# Altium PCB PCB.PcbDoc
Units mm, origin at the board's own origin, x right, y up, seen from the top; angles counter-clockwise.
Board outline 40 x 49 mm, 2 copper layers (Top Layer, Bottom Layer), stack 1.671 mm thick; 32 components, 31 nets, 117 pads, 7 vias.
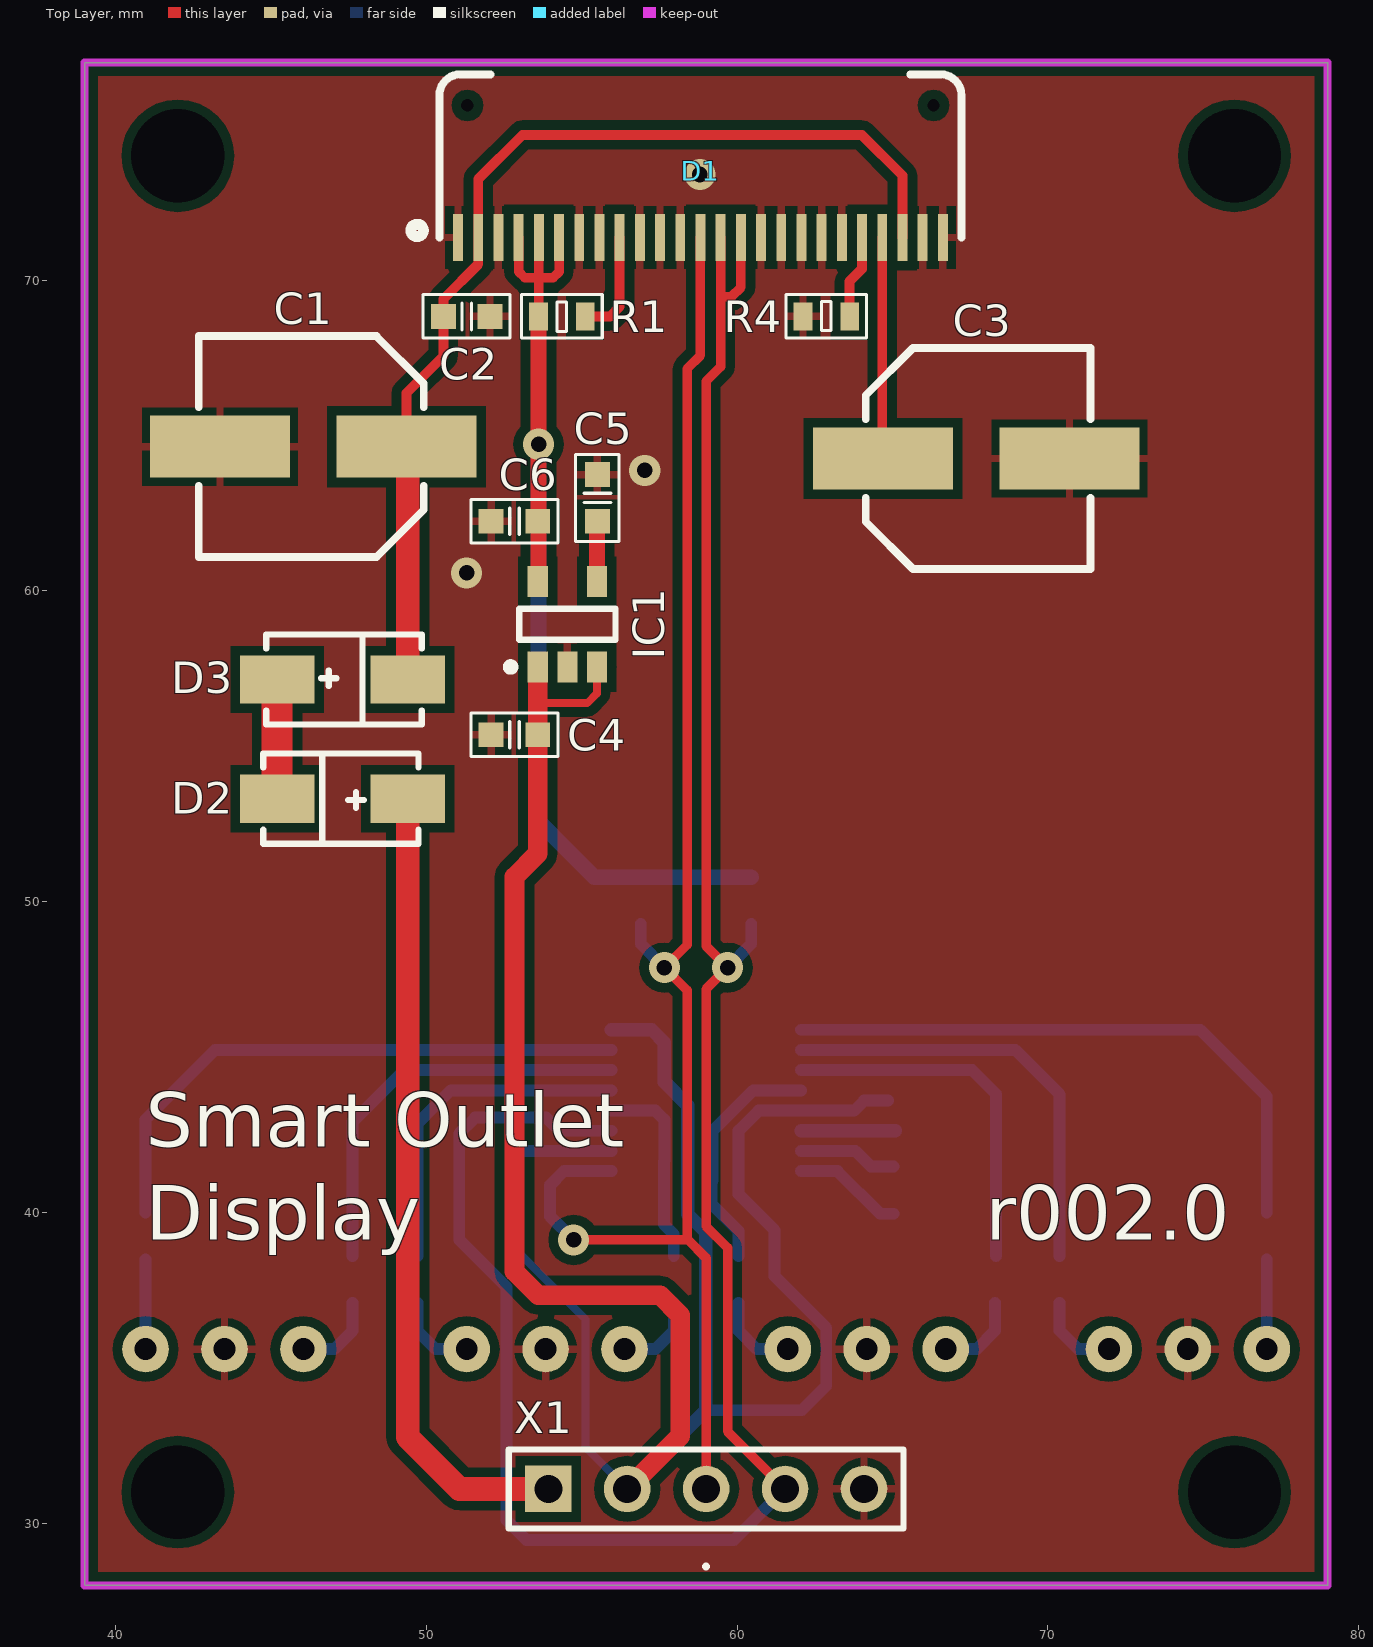
[diagram p0: Top Layer view]
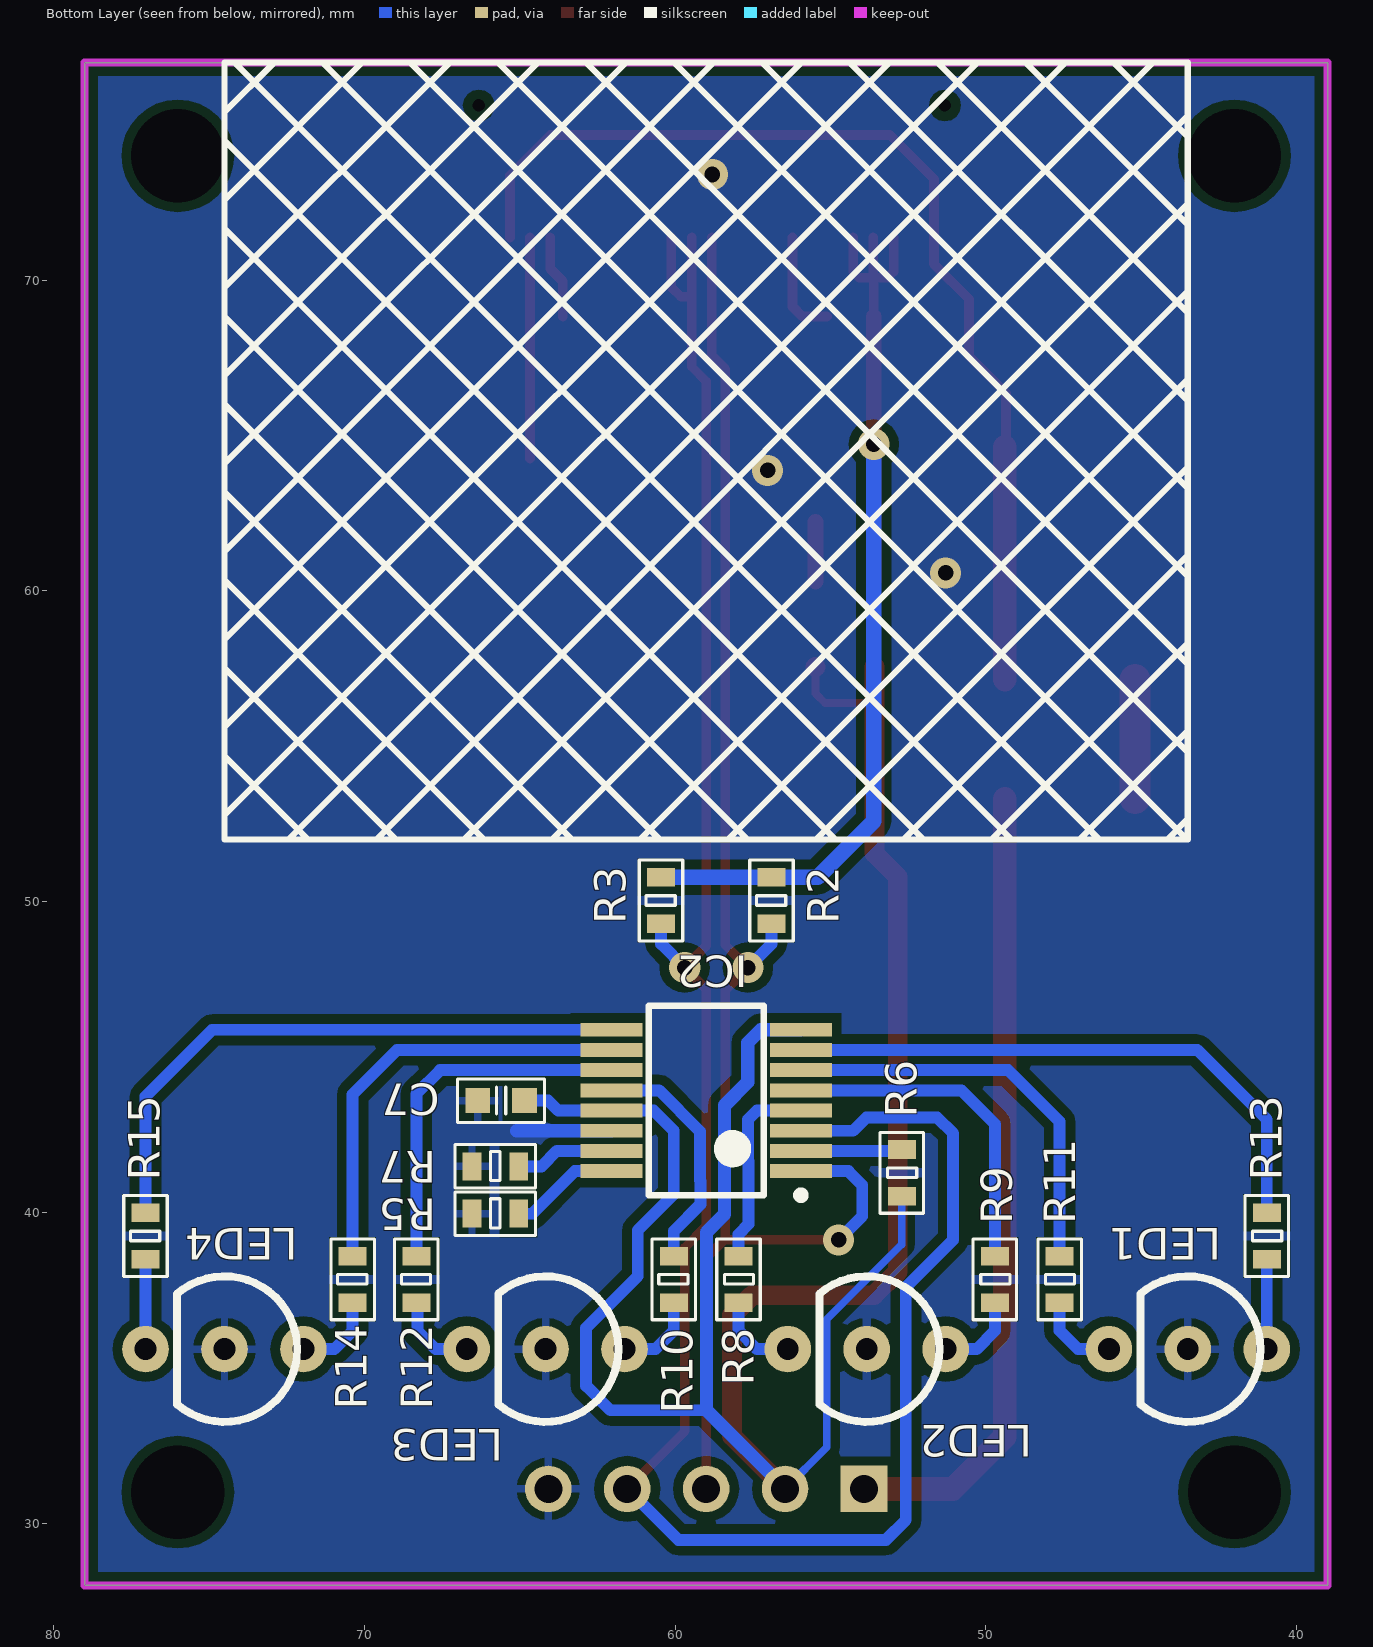
[diagram p1: Bottom Layer view, seen from below]

## Layer stack, top to bottom
Top Solder: solder mask 0.0102, Solder Resist, Dk 3.5
Top Layer: signal copper 0.0356
Dielectric 1: dielectric 1.6, FR-4, Dk 4.8
Bottom Layer: signal copper 0.0356
Bottom Solder: solder mask 0.0102, Solder Resist, Dk 3.5

## Board outline
39,28 79,28 79,77 39,77

## Design rules (kind name [scope] priority, off if disabled: settings)
Clearance [All] p1: gap=0.2 ignorepadtopadclearanceinfootprint=FALSE except(0.3: Arc-Poly Track-Poly SMDPad-Poly THPad-Poly Via-Poly Fill-Poly Poly-Poly Poly-Region Poly-Text Poly-Hole)
HoleSize [All] p1: absolutevalues=TRUE maxlimit=3 minlimit=0.025 maxpercent=80.000 minpercent=20.000
MinimumSolderMaskSliver [All] p1: minsoldermaskwidth=0
PolygonConnect [All] p1: thpad.connectstyle=Relief thpad.reliefconductorwidth=0.254 thpad.reliefentries=4 thpad.polygonreliefangle="90 Angle" thpad.airgapwidth=0.254 smdpad.connectstyle=Relief smdpad.reliefconductorwidth=0.254 smdpad.reliefentries=4 smdpad.polygonreliefangle="90 Angle" smdpad.airgapwidth=0.254 via.connectstyle=Direct via.reliefconductorwidth=0.254 via.reliefentries=4 via.polygonreliefangle="90 Angle" via.airgapwidth=0.254
RoutingVias [All] p1: holewidth=0.711 width=1.27 viastyle="Through Hole" minholewidth=0.5 minwidth=1 maxholewidth=0.711 maxwidth=1.27
SilkToSilkClearance [All] p1: silktosilkclearance=0.051
SilkToSolderMaskClearance [IsPad] p1: minsilkscreentomaskgap=0 clearancetoexposedcopper=TRUE
SolderMaskExpansion [All] p1: expansion=0.102
Width [All] p1: maxlimit=2.54 minlimit=0.254 preferedwidth=1.27
26 further rules are at their usual default settings.

## Components (designator, comment, footprint, x,y, rotation, side; value= is the part's Value field where it differs from the comment)
C1 "4.7u" R79 46.355,64.643 r270 top value=470u
C2 "100n" C_0603 51.293,68.834 r180 top
C3 "4.7u" R79 67.691,64.262 r90 top value=470u
C4 "1u" C_0603 52.832,55.372 r180 top
C5 "100n" C_0603 55.499,62.992 r90 top
C6 "2.2u" C_0603 52.832,62.242 r180 top
C7 "100n" C_0603 65.6,43.6 r0 bottom
D1 "UG-9664HSWAG01" UG-9664HSWAG01 58.816,71.374 r0 top
D2 "D_DO-214AC" DO-214AC 47.295,53.315 r0 top
D3 "D_DO-214AC" DO-214AC 47.295,57.15 r180 top
IC1 "LP2985" SOT23-5 54.534,58.928 r90 top
IC2 "ADG728" SSOP-16 59,43.604 r0 bottom
LED1 "GNL-3015" GNL-3015 43.5,35.604 r180 bottom
LED2 "GNL-3015" GNL-3015 53.833,35.604 r180 bottom
LED3 "GNL-3015" GNL-3015 64.167,35.604 r180 bottom
LED4 "GNL-3015" GNL-3015 74.5,35.604 r180 bottom
R1 "10k" R_0603 54.356,68.834 r0 top
R2 "4.7k" R_0603 56.896,50.038 r270 bottom
R3 "4.7k" R_0603 60.452,50.038 r270 bottom
R4 "910k" R_0603 62.865,68.834 r180 top
R5 "10k" R_0603 65.786,39.959 r0 bottom
R6 "10k" R_0603 52.705,41.275 r90 bottom
R7 "10k" R_0603 65.786,41.483 r0 bottom
R8 "560" R_0603 57.958,37.846 r90 bottom
R9 "560" R_0603 49.708,37.846 r90 bottom
R10 "560" R_0603 60.042,37.846 r270 bottom
R11 "560" R_0603 47.625,37.846 r90 bottom
R12 "560" R_0603 68.326,37.846 r270 bottom
R13 "560" R_0603 40.96,39.243 r90 bottom
R14 "560" R_0603 70.375,37.846 r270 bottom
R15 "560" R_0603 77.04,39.243 r270 bottom
X1 "PLS-5" PLS-5-3D 53.92,31.104 r0 top

## Footprints (in the part's own frame and the unit in brackets; to place one, negate y for a bottom-side part, rotate by r counter-clockwise, add the part's x,y. Pads: shape width x height; smd on the part's side, far side on the other; paste and mask are expansions set on the pad)
C_0603 [mm] "Chip Capacitor; Body 1.6 x 0.8 mm (LxW typ)"
  rect 0.8x0.8 smd: 1(-0.75,0) 2(0.75,0)
  silkscreen extent -1.4,-0.7 1.4,0.7, body extent -0.8,-0.4 0.8,0.4, height 0.3
DO-214AC [mm]
  rect 2.4x1.55 smd: 1(2.1,0) 2(-2.1,0)
  silkscreen extent -2.55,-1.45 2.45,1.45, body extent -2.6,-1.3 2.6,1.3, height 2.39
GNL-3015 [mm]
  round 1.5 hole 0.7: 1(-2.54,0) 2(0,0) 3(2.54,0)
  silkscreen extent -1.52,-2.34 2.34,2.34, body extent -2.79,-2.02 2.79,2.03, height 8.21
PLS-5-3D [mm] "Connector; Header; 5 Position"
  rect 1.5x1.5 hole 0.9: 1(0,0)
  round 1.5 hole 0.9: 2(2.54,0) 3(5.08,0) 4(7.62,0) 5(10.16,0)
  silkscreen extent -1.27,-1.27 11.43,1.27, body extent -1.27,-1.27 11.43,1.27, height 8.44
R79 [mm]
  rect 2x4.5 smd: 1(0,3) 2(0,-3)
  silkscreen extent -3.56,-3.68 3.56,3.56, body extent -3.3,-3.5 3.3,3.5, height 3.91
R_0603 [mm]
  rect 0.6x0.9 smd: 1(-0.75,0) 2(0.75,0)
  silkscreen extent -1.3,-0.7 1.3,0.7, body extent -0.8,-0.41 0.8,0.41, height 0.45
SOT23-5 [mm]
  rect 1x0.65 smd: 1(-1.375,0.95) 2(-1.375,0) 3(-1.375,-0.95) 4(1.375,-0.95) 5(1.375,0.95)
  silkscreen extent -1.5,-1.55 0.5,1.95, body extent -1.25,-1.5 1.25,1.5, height 1.15
SSOP-16 [mm]
  rect 2x0.45 smd: 1(-3.05,2.275) 2(-3.05,1.625) 3(-3.05,0.975) 4(-3.05,0.325) 5(-3.05,-0.325) 6(-3.05,-0.975) 7(-3.05,-1.625) 8(-3.05,-2.275) 9(3.05,-2.275) 10(3.05,-1.625) 11(3.05,-0.975) 12(3.05,-0.325) 13(3.05,0.325) 14(3.05,0.975) 15(3.05,1.625) 16(3.05,2.275)
  silkscreen extent -3.17,-3.05 1.85,3.17, body extent -3.9,-3.1 3.9,3.1, height 1.9
UG-9664HSWAG01 [mm]
  rect 0x0 hole 0.4: 0(-7.5,4.25) 0(7.5,4.25)
  rect 0.32x1.5 smd: 1(-7.8,0) 2(-7.15,0) 3(-6.5,0) 4(-5.85,0) 5(-5.2,0) 6(-4.55,0) 7(-3.9,0) 8(-3.25,0) 9(-2.6,0) 10(-1.95,0) 11(-1.3,0) 12(-0.65,0) 13(0,0) 14(0.65,0) 15(1.3,0) 16(1.95,0) 17(2.6,0) 18(3.25,0) 19(3.9,0) 20(4.55,0) 21(5.2,0) 22(5.85,0) 23(6.5,0) 24(7.15,0) 25(7.8,0)
  silkscreen extent -8.4,0 8.4,5.25

## Part data
C1 C3: library part Electrolit, "Electrolit capasitor"
C2 C4 C5 C6 C7: library part C0603, "Capacitor"
D1: "Display"
D2 D3: "Diode"
IC1: "150-mA Low-noise Low-dropout Regulator With Shutdown", Link=https://www.rcscomponents.kiev.ua/product/lp2985a-33dbvr_31082.html
IC2: "2-Wire Serially Controlled, Matrix Switches"
LED1 LED2 LED3 LED4: "Bi-color LED"
R1 R2 R3 R4 R5 R6 R7 R8 R9 R10 R11 R12 R13 R14 R15: library part R0603, "Resistor"
X1: "Header, 5-Pin", LatestRevisionDate=17-Jul-2002, LatestRevisionNote="Re-released for DXP Platform.", Publisher="Altium Limited"

## Free pads (board coordinates)
  round 0 hole 3: 0(42,31) 0(42,74) 0(76,31) 0(76,74)

## Via types
v1: diameter 1, hole 0.5, Top Layer to Bottom Layer, tented both sides, 6 vias
v2: diameter 1, hole 0.5, Top Layer to Bottom Layer, 1 vias

## Nets (pads, with @x,y where several pads share a name; then routed paths per layer and width w, separated by ;. In a path a pad name is that pad's centre, name@x,y a point inside that pad or via, vN(x,y) a via of type N, cw(c..) or ccw(c..) an arc to the next point about the centre after c; other vN are vias at no path point)
3.3V: C6.1 D1.4 D1.5 D1.6 IC1.5 R1.1 R2.1 R3.1 | length 34.5
  Top Layer w0.305: D1.4 52.966,70.275 53.162,70.079 53.613,70.079 ; R1.1 53.606,70.072 53.613,70.079 ; D1.5 53.616,70.082 53.613,70.079 ; D1.6 54.266,70.268 54.077,70.079 53.613,70.079
  Top Layer w0.508: IC1.5@53.606,60.303 v1(53.606,64.719) R1.1
  Bottom Layer w0.508: v1(53.606,64.719) 53.606,52.591 55.409,50.788 R2.1 R3.1
5V: C4.1 C7.1 IC1.1 IC1.3 IC2.8 IC2.13 R6.1 X1.2 | length 82.5
  Top Layer w0.254: 53.582,56.388 55.17,56.388 55.484,56.702 IC1.3
  Top Layer w0.635: IC1.1 53.582,57.551 53.582,56.388 C4.1 53.582,51.55 52.832,50.8 52.832,38.1 53.594,37.338 57.516,37.338 58.166,36.688 58.166,32.81 X1.2 ; IC1.3 IC1.3@55.487,57.55
  Bottom Layer w0.254: R6.1 52.705,38.974 55.118,36.561 55.118,32.446 X1.2
  Bottom Layer w0.381: 58.989,33.633 62.081,33.633 62.865,34.417 62.865,36.283 61.202,37.946 61.202,39.426 60.042,40.586 60.042,42.634 60.686,43.279 IC2.13 63.759,43.279 64.08,43.6 C7.1
  Bottom Layer w0.432: IC2.8 57.245,45.879 57.658,45.466 57.658,44.196 58.411,43.443 58.411,39.939 58.989,39.361 58.989,33.633 X1.2
11V: C1.1 C2.2 D1.2 D1.23 D3.2 | length 33.8
  Top Layer w0.32: C1.1 49.355,66.373 50.543,67.561 C2.2 50.543,69.39 51.666,70.513 D1.2 51.666,73.256 53.086,74.676 64.008,74.676 65.316,73.368 D1.23
  Top Layer w0.762: D3.2 C1.1@49.395,64.643
12V: D2.1 X1.1 | length 25.8
  Top Layer w0.762: D2.1 49.395,32.774 51.065,31.104 X1.1
GND: C1.2 C2.1 C3.2 C4.2 C5.2 C6.2 C7.2 D1.1 D1.3 D1.7 D1.8 D1.10 D1.11 D1.12 D1.16 D1.17 D1.18 D1.19 D1.20 D1.24 D1.25 IC1.2 IC2.14 LED1.2 LED2.2 LED3.2 LED4.2 R4.2 R5.2 R7.2 X1.5 | length 3
  Bottom Layer w0.42: IC2.14 65.095,42.629
  other v1: 51.293,60.579 57.023,63.881 58.8,73.4
LED1: LED1.1 R11.1 | length 2.7
  Bottom Layer w0.381: LED1.1 47.034,35.604 47.625,36.195 R11.1
LED2: LED1.3 R13.1 | length 2.9
  Bottom Layer w0.381: LED1.3 R13.1
LED3: LED2.1 R8.1 | length 2.7
  Bottom Layer w0.381: LED2.1 57.367,35.604 57.958,36.195 R8.1
LED4: LED2.3 R9.1 | length 2.7
  Bottom Layer w0.381: R9.1 49.708,36.195 50.299,35.604 LED2.3
LED5: LED3.1 R12.2 | length 2.7
  Bottom Layer w0.381: LED3.1 67.701,35.604 68.292,36.195 R12.2@68.292,37.096
LED6: LED3.3 R10.2 | length 2.7
  Bottom Layer w0.381: R10.2 60.042,36.195 60.633,35.604 LED3.3
LED7: LED4.1 R15.2 | length 2.9
  Bottom Layer w0.381: LED4.1 R15.2
LED8: LED4.3 R14.2 | length 2.7
  Bottom Layer w0.381: R14.2 70.375,36.195 70.966,35.604 LED4.3
NetC3_1: C3.1 D1.22 | length 7.1
  Top Layer w0.32: C3.1@64.666,64.262 D1.22
NetC5_1: C5.1 IC1.4 | length 1.9
  Top Layer w0.508: IC1.4 C5.1@55.484,62.227
NetD1_9: D1.9 R1.2 | length 3.5
  Top Layer w0.32: R1.2 55.905,68.834 56.216,69.145 D1.9
NetD1_21: D1.21 R4.1 | length 2.7
  Top Layer w0.32: R4.1 63.615,69.965 64.016,70.366 D1.21
NetD2_2: D2.2 D3.1 | length 3.8
  Top Layer w1: D2.2 D3.1
NetIC2_2: IC2.2 R6.2 | length 3.1
  Bottom Layer w0.381: R6.2@52.82,41.979 IC2.2
NetIC2_4: IC2.4 R8.2 | length 6.4
  Bottom Layer w0.381: IC2.4 57.367,43.279 57.658,42.988 57.658,41.668 57.639,41.649 57.639,39.62 57.958,39.301 R8.2
NetIC2_5: IC2.5 R9.2 | length 10.9
  Bottom Layer w0.381: R9.2 49.708,42.85 50.787,43.929 IC2.5
NetIC2_6: IC2.6 R11.2 | length 13.3
  Bottom Layer w0.381: R11.2 47.625,42.926 49.278,44.579 IC2.6
NetIC2_7: IC2.7 R13.2 | length 18.9
  Bottom Layer w0.381: R13.2 40.96,42.992 43.197,45.229 IC2.7
NetIC2_9: IC2.9 R15.1 | length 19.6
  Bottom Layer w0.381: IC2.9 74.898,45.879 77.04,43.737 R15.1
NetIC2_10: IC2.10 R14.1 | length 14.1
  Bottom Layer w0.381: IC2.10 68.944,45.229 70.375,43.798 R14.1
NetIC2_11: IC2.11 R12.1 | length 11.8
  Bottom Layer w0.381: IC2.11 67.562,44.579 68.326,43.815 R12.1
NetIC2_12: IC2.12 R10.1 | length 7.8
  Bottom Layer w0.381: R10.1 60.042,39.399 59.182,40.259 59.182,41.009 59.201,41.028 59.201,42.615 60.515,43.929 IC2.12
NetIC2_15: IC2.15 R7.1 | length 3.2
  Bottom Layer w0.381: IC2.15 63.8,41.979 64.296,41.483 R7.1
NetIC2_16: IC2.16 R5.1 | length 3.6
  Bottom Layer w0.381: IC2.16 63.226,41.329 64.596,39.959 R5.1
SCL: D1.13 IC2.1 R2.2 X1.3 | length 50.9
  Top Layer w0.305: v2(54.737,39.116) 58.393,39.116 ; D1.13 58.816,67.579 58.393,67.156 58.393,48.614 v1(57.658,47.879) 58.393,47.144 58.393,39.143 59,38.536 X1.3
  Bottom Layer w0.381: v2(54.737,39.116) 53.975,39.878 53.975,40.882 54.422,41.329 IC2.1 ; R2.2 56.896,48.641 v1(57.658,47.879)
SDA: D1.14 D1.15 IC2.3 R3.2 X1.4 | length 74.5
  Top Layer w0.305: D1.14 59.466,69.469 ; D1.15 60.116,69.768 59.817,69.469 59.466,69.469 ; X1.4 59.69,32.954 59.69,38.862 59,39.552 59,47.189 v1(59.69,47.879) 59,48.569 59,66.747 59.466,67.213 59.466,69.469
  Bottom Layer w0.381: IC2.3 54.272,42.629 53.848,43.053 51.562,43.053 51.054,42.545 51.054,39.116 52.578,37.592 52.578,30.099 53.213,29.464 59.9,29.464 X1.4 ; v1(59.69,47.879) 60.452,48.641 R3.2
pads on no net: D1.0

## Polygon pours and split planes (outlines as drawn)
GND on Top Layer "Top Layer-GND" (solid, remove dead copper, pour order 2): 39,80 79,80 79,28 39,28
no net on Bottom Overlay (hatched 45Degree grid 2 track 0.2, remove dead copper): 43.5,77 74.5,77 74.5,52 43.5,52
GND on Bottom Layer "Bottom Layer-GND" (solid, remove dead copper, pour order 0): 39,80 79,80 79,28 39,28

## Keep-outs
Keep-Out Layer:
  the board outline again, w0.254

## Silkscreen, mask and mechanical layers (free items; w line width, h text height)
Top Overlay:
  circle w0.35: c49.7,71.6 r0.2
  lines w0.254: 59,28.604 59,28.604
  text "Smart Outlet / Display" at 40.96,38.536 h3
  text "r002.0" at 68,38.536 h3

## Dimensions
42,74 to 39,77 on Mechanical 1
42,74 to 39,77 on Mechanical 1
79,28 to 79,77 on Mechanical 1
39,28 to 79,28 on Mechanical 1